# Altium PCB PCB1.PcbDoc (part 2 of 3)
Units mm, origin at the board's own origin, x right, y up, seen from the top; angles counter-clockwise.
Board outline 40 x 42 mm, 4 copper layers (Top Layer, GND, VCC, Bottom Layer), stack 4.941 mm thick; 42 components, 33 nets, 156 pads, 53 vias.
Unrouted connection lines stored in the file: 1.
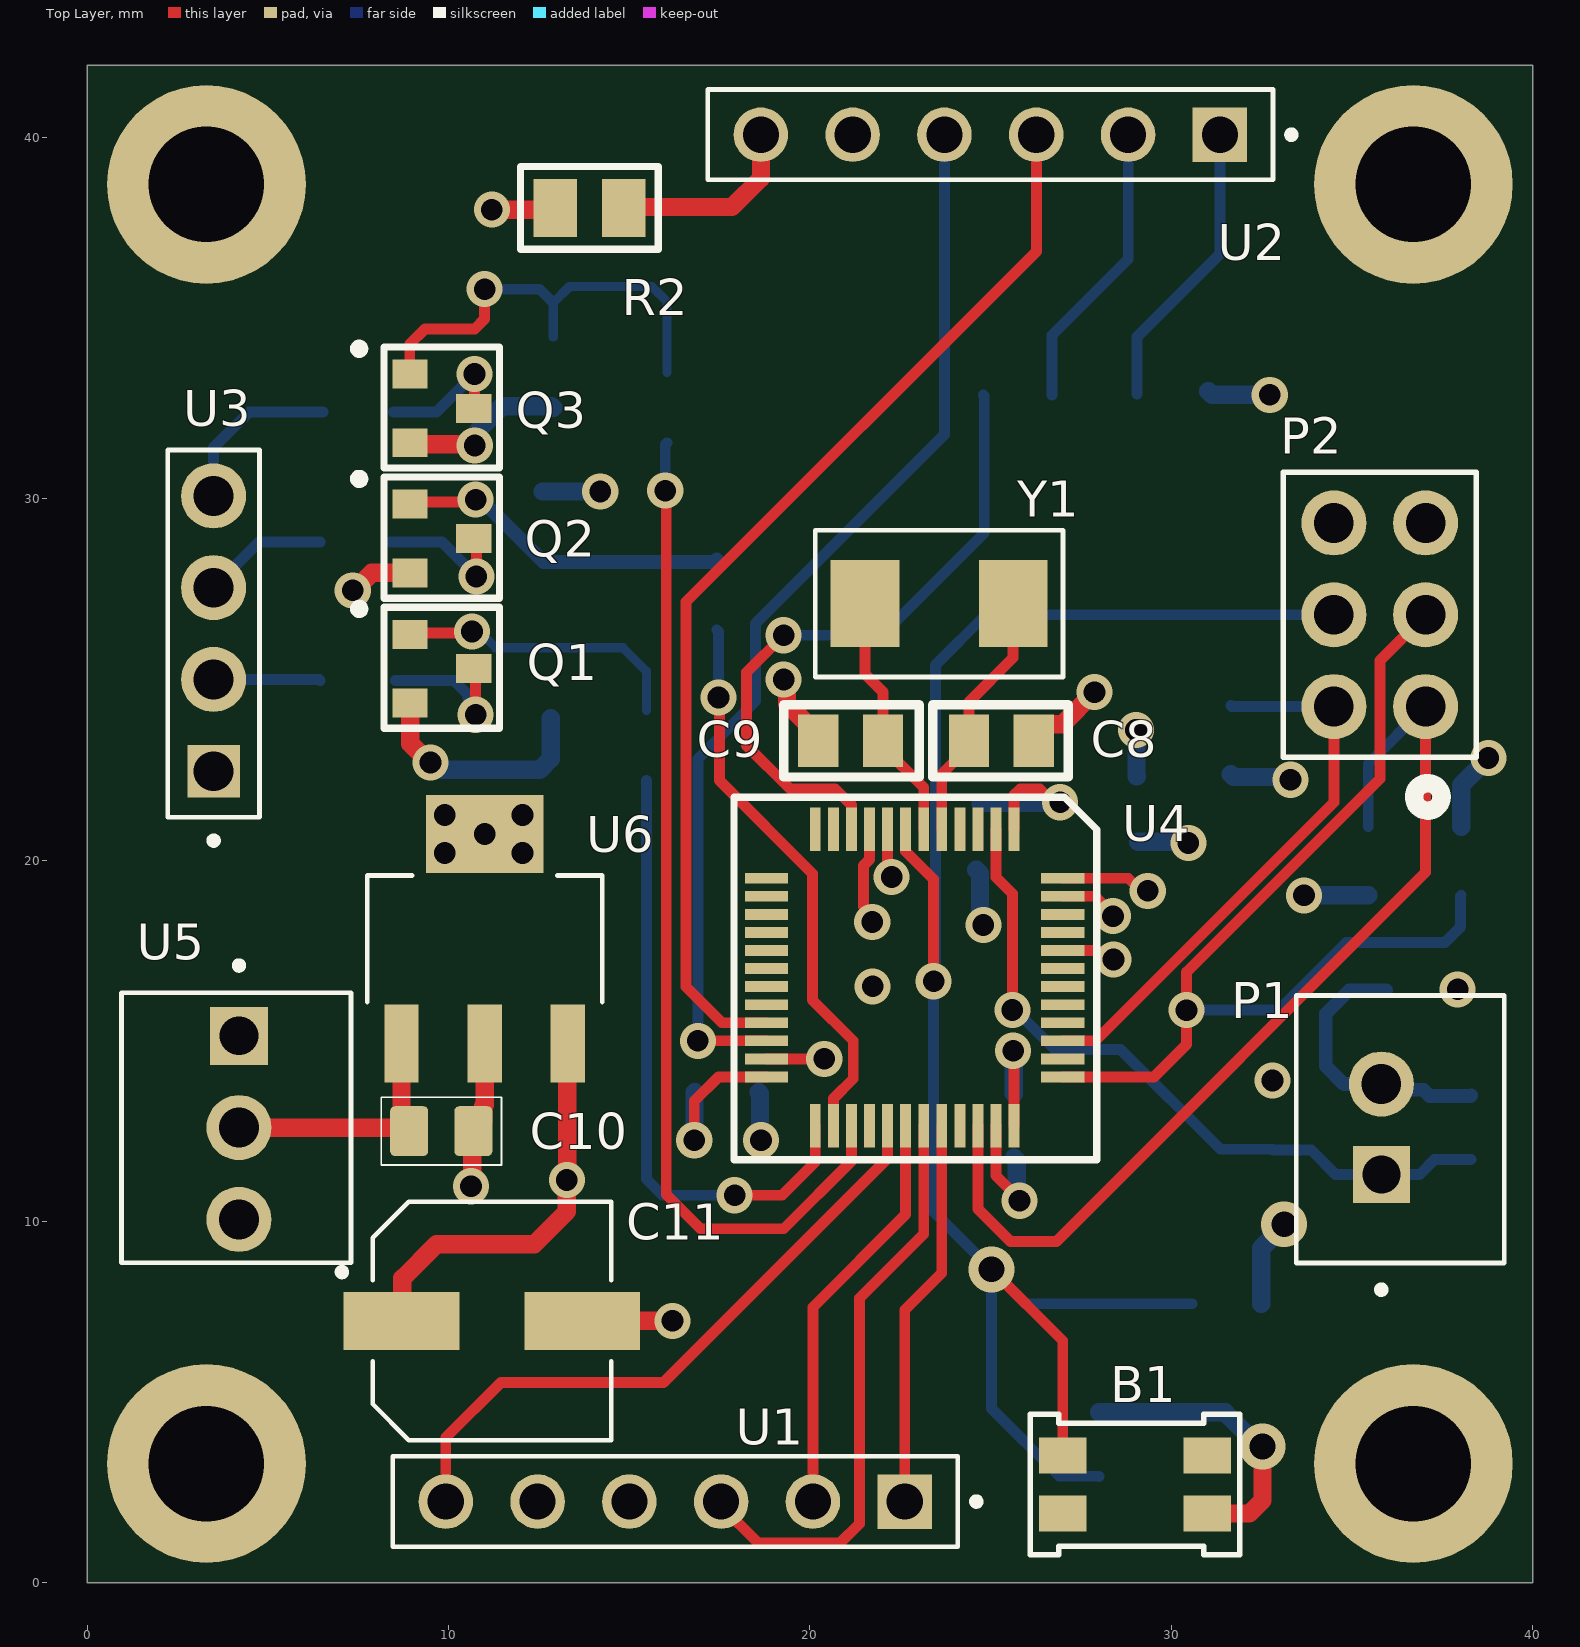
[diagram p0: Top Layer view]

## Part data (continued)
R1 R2 R3: library part MCU08050Z0000ZP500, "Zero Ohm Resistor, Jumper, 0805 [2012 Metric], Thin Film, 200 mW, 1.5 A, Surface Mount Device", Case Code (Imperial)=0805, Case Code (Metric)=2012, LCSC=C2074916, Manufacturer=Vishay, Max Operating Temperature=125°C, Max Power Dissipation=200mW, Min Operating Temperature=-55°C, Power Dissipation=125mW, Voltage Rating=150V, Case/Package=0805, Category="Chip SMD Resistors", China RoHS=Non-Compliant, ComponentLink1Description=https://datasheet.octopart.com:443/MCU08050Z0000ZP500-Vishay-datasheet-182027961.pdf?src-supplier=IHS, ComponentLink1URL=https://datasheet.octopart.com:443/MCU08050Z0000ZP500-Vishay-datasheet-182027961.pdf?src-supplier=IHS, ComponentLink2Description=https://datasheet.octopart.com:443/MCU08050Z0000ZP500-Vishay-datasheet-81842982.pdf?src-supplier=Upverter, ComponentLink2URL=https://datasheet.octopart.com:443/MCU08050Z0000ZP500-Vishay-datasheet-81842982.pdf?src-supplier=Upverter, ComponentLink3Description=https://datasheet.octopart.com:443/MCU08050Z0000ZP500-Vishay-datasheet-190005737.pdf?src-supplier=TME, ComponentLink3URL=https://datasheet.octopart.com:443/MCU08050Z0000ZP500-Vishay-datasheet-190005737.pdf?src-supplier=TME, ComponentLink4Description=https://datasheet.octopart.com:443/MCU08050Z0000ZP500-Vishay-datasheet-66078241.pdf?src-supplier=Newark, ComponentLink4URL=https://datasheet.octopart.com:443/MCU08050Z0000ZP500-Vishay-datasheet-66078241.pdf?src-supplier=Newark, ComponentLink5Description=https://datasheet.octopart.com:443/MCU08050Z0000ZP500-Vishay-datasheet-178522811.pdf?src-supplier=Newark, ComponentLink5URL=https://datasheet.octopart.com:443/MCU08050Z0000ZP500-Vishay-datasheet-178522811.pdf?src-supplier=Newark, ComponentLink6Description=https://datasheet.octopart.com:443/MCU08050Z0000ZP500-Vishay-datasheet-112277133.pdf?src-supplier=Newark, ComponentLink6URL=https://datasheet.octopart.com:443/MCU08050Z0000ZP500-Vishay-datasheet-112277133.pdf?src-supplier=Newark, ComponentLink7Description=https://datasheet.octopart.com/MCU08050Z0000ZP500-Vishay-datasheet-12543201.pdf, ComponentLink7URL=https://datasheet.octopart.com/MCU08050Z0000ZP500-Vishay-datasheet-12543201.pdf, ComponentLink8Description=https://datasheet.octopart.com/MCU08050Z0000ZP500-Vishay-datasheet-12532999.pdf, ComponentLink8URL=https://datasheet.octopart.com/MCU08050Z0000ZP500-Vishay-datasheet-12532999.pdf, ComponentLink9Description=https://datasheet.octopart.com/MCU08050Z0000ZP500-Vishay-datasheet-12520289.pdf, ComponentLink9URL=https://datasheet.octopart.com/MCU08050Z0000ZP500-Vishay-datasheet-12520289.pdf, ComponentLink10Description=https://datasheet.octopart.com/MCU08050Z0000ZP500-Vishay-datasheet-12510709.pdf, ComponentLink10URL=https://datasheet.octopart.com/MCU08050Z0000ZP500-Vishay-datasheet-12510709.pdf, ComponentLink11Description=https://datasheet.octopart.com:443/MCU08050Z0000ZP500-Vishay-datasheet-57863180.pdf?src-supplier=Future+Electronics, ComponentLink11URL=https://datasheet.octopart.com:443/MCU08050Z0000ZP500-Vishay-datasheet-57863180.pdf?src-supplier=Future+Electronics, ComponentLink12Description=https://datasheet.octopart.com:443/MCU08050Z0000ZP500-Vishay-datasheet-11731685.pdf?src-supplier=Arrow+Electronics, ComponentLink12URL=https://datasheet.octopart.com:443/MCU08050Z0000ZP500-Vishay-datasheet-11731685.pdf?src-supplier=Arrow+Electronics, ComponentLink13Description=http://sigma.octopart.com:80/rohs_statement/Vishay-company-15.pdf?src-supplier=Compliance+Statements, ComponentLink13URL=http://sigma.octopart.com:80/rohs_statement/Vishay-company-15.pdf?src-supplier=Compliance+Statements, Composition="Thin Film", Contact Plating=Tin, Depth=1.25mm, Height=450µm, Lead Free="Lead Free", Lifecycle Status=Production, Manufacturer Part Number=MCU08050Z0000ZP500, Military Standard=Not, Mounting Technology="Surface Mount", Number of Terminals=2, Number of Terminations=2, Power Rating=200mW, Pricing="5000=0,03643, 10000=0,03612, 20000=0,0355, 30000=0,03488, 40000=0,03426 (USD)", Radiation Hardening=No, REACH SVHC=Yes, RoHS=Compliant, Stock=5000, Supplier=Avnet, Supplier Part Number=MCU08050Z0000ZP500, Voltage Rating (DC)=150V, Width=1.25mm
R4 R7 R11 R12: library part CRCW0805100RFKEA, "Res Thick Film 0805 100 Ohm 1% 0.125W(1/8W) ±100ppm/℃ Pad SMD Automotive T/R", Case Code (Imperial)=0805, LCSC=C844936, Manufacturer=Vishay, Manufacturer Package Identifier=CRCW0805-e3, Max Operating Temperature=155°C, Max Power Dissipation=125mW, Min Operating Temperature=-55°C, Supplier Part Number=541-100CCT-ND, Temperature Coefficient=100ppm/°C, Tolerance=1%, Voltage Rating=150V, Case/Package=0805, Category="Chip SMD Resistors", China RoHS=Non-Compliant, ComponentLink1Description=https://datasheet.octopart.com:443/CRCW0805100RFKEA-Vishay-datasheet-175423584.pdf?src-supplier=IHS, ComponentLink1URL=https://datasheet.octopart.com:443/CRCW0805100RFKEA-Vishay-datasheet-175423584.pdf?src-supplier=IHS, ComponentLink2Description=https://datasheet.octopart.com:443/CRCW0805100RFKEA-Vishay-datasheet-83961561.pdf?src-supplier=Newark, ComponentLink2URL=https://datasheet.octopart.com:443/CRCW0805100RFKEA-Vishay-datasheet-83961561.pdf?src-supplier=Newark, ComponentLink3Description=https://datasheet.octopart.com:443/CRCW0805100RFKEA-Vishay-datasheet-11516975.pdf?src-supplier=Newark, ComponentLink3URL=https://datasheet.octopart.com:443/CRCW0805100RFKEA-Vishay-datasheet-11516975.pdf?src-supplier=Newark, ComponentLink4Description=https://datasheet.octopart.com:443/CRCW0805100RFKEA-Vishay-datasheet-41302739.pdf?src-supplier=Newark, ComponentLink4URL=https://datasheet.octopart.com:443/CRCW0805100RFKEA-Vishay-datasheet-41302739.pdf?src-supplier=Newark, ComponentLink5Description=https://datasheet.octopart.com:443/CRCW0805100RFKEA-Vishay-datasheet-33013972.pdf?src-supplier=Newark, ComponentLink5URL=https://datasheet.octopart.com:443/CRCW0805100RFKEA-Vishay-datasheet-33013972.pdf?src-supplier=Newark, ComponentLink6Description=https://datasheet.octopart.com:443/CRCW0805100RFKEA-Vishay-datasheet-62317937.pdf?src-supplier=element14+APAC, ComponentLink6URL=https://datasheet.octopart.com:443/CRCW0805100RFKEA-Vishay-datasheet-62317937.pdf?src-supplier=element14+APAC, ComponentLink7Description=https://datasheet.octopart.com:443/CRCW0805100RFKEA-Vishay-datasheet-14722531.pdf?src-supplier=element14+APAC, ComponentLink7URL=https://datasheet.octopart.com:443/CRCW0805100RFKEA-Vishay-datasheet-14722531.pdf?src-supplier=element14+APAC, ComponentLink8Description=https://datasheet.octopart.com:443/CRCW0805100RFKEA.-Vishay-datasheet-78776209.pdf?src-supplier=element14+APAC, ComponentLink8URL=https://datasheet.octopart.com:443/CRCW0805100RFKEA.-Vishay-datasheet-78776209.pdf?src-supplier=element14+APAC, ComponentLink9Description=https://datasheet.octopart.com:443/CRCW0805100RFKEA-Vishay-datasheet-66077789.pdf?src-supplier=element14+APAC, ComponentLink9URL=https://datasheet.octopart.com:443/CRCW0805100RFKEA-Vishay-datasheet-66077789.pdf?src-supplier=element14+APAC, ComponentLink10Description=https://datasheet.octopart.com:443/CRCW0805100RFKEA-Vishay-datasheet-16179825.pdf?src-supplier=element14+APAC, ComponentLink10URL=https://datasheet.octopart.com:443/CRCW0805100RFKEA-Vishay-datasheet-16179825.pdf?src-supplier=element14+APAC, ComponentLink11Description=https://datasheet.octopart.com:443/CRCW0805100RFKEA-Vishay-datasheet-5300368.pdf?src-supplier=Future+Electronics, ComponentLink11URL=https://datasheet.octopart.com:443/CRCW0805100RFKEA-Vishay-datasheet-5300368.pdf?src-supplier=Future+Electronics, ComponentLink12Description=https://datasheet.octopart.com:443/CRCW0805100RFKEA-Vishay-datasheet-62316122.pdf?src-supplier=Future+Electronics, ComponentLink12URL=https://datasheet.octopart.com:443/CRCW0805100RFKEA-Vishay-datasheet-62316122.pdf?src-supplier=Future+Electronics, ComponentLink13Description=https://datasheet.octopart.com:443/CRCW0805100RFKEA-Vishay-datasheet-5306405.pdf?src-supplier=RS+(Formerly+Allied+Electronics), ComponentLink13URL=https://datasheet.octopart.com:443/CRCW0805100RFKEA-Vishay-datasheet-5306405.pdf?src-supplier=RS+(Formerly+Allied+Electronics), ComponentLink14Description=https://datasheet.octopart.com:443/CRCW0805100RFKEA-Vishay-Dale-datasheet-47688880.pdf?src-supplier=RS+(Formerly+Allied+Electronics), ComponentLink14URL=https://datasheet.octopart.com:443/CRCW0805100RFKEA-Vishay-Dale-datasheet-47688880.pdf?src-supplier=RS+(Formerly+Allied+Electronics), ComponentLink15Description=https://datasheet.octopart.com:443/CRCW0805100RFKEA-Vishay-datasheet-12001583.pdf?src-supplier=RS+(Formerly+Allied+Electronics), ComponentLink15URL=https://datasheet.octopart.com:443/CRCW0805100RFKEA-Vishay-datasheet-12001583.pdf?src-supplier=RS+(Formerly+Allied+Electronics), ComponentLink16Description=https://datasheet.octopart.com:443/CRCW0805100RFKEA-Vishay-datasheet-17834126.pdf?src-supplier=TME, ComponentLink16URL=https://datasheet.octopart.com:443/CRCW0805100RFKEA-Vishay-datasheet-17834126.pdf?src-supplier=TME, ComponentLink17Description=https://datasheet.octopart.com/D-CRCW-e3-Standard-Thick-Film-Chip-Resistors-Vishay-datasheet-family-64.pdf, ComponentLink17URL=https://datasheet.octopart.com/D-CRCW-e3-Standard-Thick-Film-Chip-Resistors-Vishay-datasheet-family-64.pdf, ComponentLink18Description=https://datasheet.octopart.com:443/CRCW0805100RFKEA-Vishay-datasheet-13242068.pdf?src-supplier=Farnell, ComponentLink18URL=https://datasheet.octopart.com:443/CRCW0805100RFKEA-Vishay-datasheet-13242068.pdf?src-supplier=Farnell, ComponentLink19Description=https://datasheet.octopart.com:443/CRCW0805100RFKEA-Vishay-datasheet-13195083.pdf?src-supplier=Farnell, ComponentLink19URL=https://datasheet.octopart.com:443/CRCW0805100RFKEA-Vishay-datasheet-13195083.pdf?src-supplier=Farnell, ComponentLink20Description=https://datasheet.octopart.com:443/CRCW0805100RFKEA-Vishay-datasheet-13034211.pdf?src-supplier=Farnell, ComponentLink20URL=https://datasheet.octopart.com:443/CRCW0805100RFKEA-Vishay-datasheet-13034211.pdf?src-supplier=Farnell, ComponentLink21Description=https://datasheet.octopart.com:443/CRCW0805100RFKEA-Vishay-datasheet-12600034.pdf?src-supplier=Farnell, ComponentLink21URL=https://datasheet.octopart.com:443/CRCW0805100RFKEA-Vishay-datasheet-12600034.pdf?src-supplier=Farnell, ComponentLink22Description=https://datasheet.octopart.com:443/CRCW0805100RFKEA-Vishay-datasheet-12532161.pdf?src-supplier=Farnell, ComponentLink22URL=https://datasheet.octopart.com:443/CRCW0805100RFKEA-Vishay-datasheet-12532161.pdf?src-supplier=Farnell, ComponentLink23Description=https://datasheet.octopart.com:443/CRCW0805100RFKEA-Vishay-datasheet-12517896.pdf?src-supplier=Farnell, ComponentLink23URL=https://datasheet.octopart.com:443/CRCW0805100RFKEA-Vishay-datasheet-12517896.pdf?src-supplier=Farnell, ComponentLink24Description=https://datasheet.octopart.com:443/CRCW0805100RFKEA-Vishay-datasheet-12509762.pdf?src-supplier=Farnell, ComponentLink24URL=https://datasheet.octopart.com:443/CRCW0805100RFKEA-Vishay-datasheet-12509762.pdf?src-supplier=Farnell, ComponentLink25Description=https://datasheet.octopart.com:443/CRCW0805100RFKEA-Vishay-datasheet-10322335.pdf?src-supplier=Farnell, ComponentLink25URL=https://datasheet.octopart.com:443/CRCW0805100RFKEA-Vishay-datasheet-10322335.pdf?src-supplier=Farnell, ComponentLink26Description=https://datasheet.octopart.com:443/CRCW0805100RFKEA-Vishay-datasheet-8788789.pdf?src-supplier=Farnell, ComponentLink26URL=https://datasheet.octopart.com:443/CRCW0805100RFKEA-Vishay-datasheet-8788789.pdf?src-supplier=Farnell, ComponentLink27Description=https://datasheet.octopart.com:443/CRCW0805100RFKEA-Vishay-datasheet-8361388.pdf?src-supplier=Farnell, ComponentLink27URL=https://datasheet.octopart.com:443/CRCW0805100RFKEA-Vishay-datasheet-8361388.pdf?src-supplier=Farnell, ComponentLink28Description=https://datasheet.octopart.com:443/CRCW0805100RFKEA-Vishay-datasheet-546287.pdf?src-supplier=Farnell, ComponentLink28URL=https://datasheet.octopart.com:443/CRCW0805100RFKEA-Vishay-datasheet-546287.pdf?src-supplier=Farnell, ComponentLink29Description=https://datasheet.octopart.com:443/CRCW0805100RFKEA-Vishay-datasheet-11540273.pdf?src-supplier=Arrow+Electronics, ComponentLink29URL=https://datasheet.octopart.com:443/CRCW0805100RFKEA-Vishay-datasheet-11540273.pdf?src-supplier=Arrow+Electronics, ComponentLink30Description=https://datasheet.octopart.com:443/CRCW0805100RFKEA-Vishay-datasheet-8445837.pdf?src-supplier=element14, ComponentLink30URL=https://datasheet.octopart.com:443/CRCW0805100RFKEA-Vishay-datasheet-8445837.pdf?src-supplier=element14, ComponentLink31Description=https://datasheet.octopart.com:443/CRCW0805100RFKEA-Vishay-datasheet-5377306.pdf?src-supplier=Garrett, ComponentLink31URL=https://datasheet.octopart.com:443/CRCW0805100RFKEA-Vishay-datasheet-5377306.pdf?src-supplier=Garrett, ComponentLink32Description=https://datasheet.octopart.com:443/CRCW0805100RFKEA-Vishay-datasheet-148188.pdf?src-supplier=Garrett, ComponentLink32URL=https://datasheet.octopart.com:443/CRCW0805100RFKEA-Vishay-datasheet-148188.pdf?src-supplier=Garrett, ComponentLink33Description=https://datasheet.octopart.com:443/CRCW0805100RFKEA-Vishay-datasheet-34203.pdf?src-supplier=Garrett, ComponentLink33URL=https://datasheet.octopart.com:443/CRCW0805100RFKEA-Vishay-datasheet-34203.pdf?src-supplier=Garrett, ComponentLink34Description=http://sigma.octopart.com:80/rohs_certificate/D-CRCW-e3-Standard-Thick-Film-Chip-Resistors-Vishay-family-102.pdf?src-supplier=Compliance+Statements, ComponentLink34URL=http://sigma.octopart.com:80/rohs_certificate/D-CRCW-e3-Standard-Thick-Film-Chip-Resistors-Vishay-family-102.pdf?src-supplier=Compliance+Statements, Composition="Thick Film", Contact Plating=Tin, Depth=1.25mm, Features="Automotive AEC-Q200", Height=450µm, Lead Free="Lead Free", Length=2mm, Lifecycle Status=Production, Manufacturer Part Number=CRCW0805100RFKEA, Military Standard=Not, Mounting Technology="Surface Mount", Number of Terminals=2, Number of Terminations=2, Pins=2, Power Dissipation=125mW, Power Rating=125mW, Pricing="1=0,1, 10=0,041, 25=0,0312, 50=0,0256, 100=0,0212, 250=0,01692, 500=0,01448, 1000=0,01254 (USD)", Radiation Hardening=No, REACH SVHC=Yes, RoHS=Compliant, Schedule B="8533210045, 8533210045|8533210045|8533210045|8533210045|8533210045|8533210045|8533210045|8533210045|8533210045|8533210045|8533210045|8533210045|8533210045|8533210045|8533210045|8533210045|8533210045|8533210045|8533210045|8533210045|8533210045|8533210045|8533210045|85", Stock=224684, Supplier=DigiKey, Termination=SMD/SMT, Voltage Rating (DC)=150V, Weight=5.499807mg, Width=1.25mm, Working Voltage=150V
R5: library part CRCW0805270RFKEA, "Res Thick Film 0805 270 Ohm 1% 1/8W ±100ppm/°C Molded SMD SMD Paper T/R", Case Code (Imperial)=0805, LCSC=C844611, Manufacturer=Vishay, Manufacturer Package Identifier=CRCW0805-e3, Max Operating Temperature=155°C, Min Operating Temperature=-55°C, Power Dissipation=125mW, Supplier Part Number=541-270CCT-ND, Temperature Coefficient=100ppm/°C, Tolerance=1%, Voltage Rating=150V, Case/Package=0805, Category="Chip SMD Resistors", China RoHS=Non-Compliant, ComponentLink1Description=https://datasheet.octopart.com:443/CRCW0805270RFKEA-Vishay-datasheet-175423584.pdf?src-supplier=IHS, ComponentLink1URL=https://datasheet.octopart.com:443/CRCW0805270RFKEA-Vishay-datasheet-175423584.pdf?src-supplier=IHS, ComponentLink2Description=https://datasheet.octopart.com:443/CRCW0805270RFKEA-Vishay-datasheet-83961561.pdf?src-supplier=Newark, ComponentLink2URL=https://datasheet.octopart.com:443/CRCW0805270RFKEA-Vishay-datasheet-83961561.pdf?src-supplier=Newark, ComponentLink3Description=https://datasheet.octopart.com:443/CRCW0805270RFKEA-Vishay-datasheet-11516975.pdf?src-supplier=Newark, ComponentLink3URL=https://datasheet.octopart.com:443/CRCW0805270RFKEA-Vishay-datasheet-11516975.pdf?src-supplier=Newark, ComponentLink4Description=https://datasheet.octopart.com:443/CRCW0805270RFKEA-Vishay-datasheet-41302739.pdf?src-supplier=Newark, ComponentLink4URL=https://datasheet.octopart.com:443/CRCW0805270RFKEA-Vishay-datasheet-41302739.pdf?src-supplier=Newark, ComponentLink5Description=https://datasheet.octopart.com:443/CRCW0805270RFKEA-Vishay-datasheet-33013972.pdf?src-supplier=Newark, ComponentLink5URL=https://datasheet.octopart.com:443/CRCW0805270RFKEA-Vishay-datasheet-33013972.pdf?src-supplier=Newark, ComponentLink6Description=https://datasheet.octopart.com:443/CRCW0805270RFKEA-Vishay-datasheet-62317937.pdf?src-supplier=element14+APAC, ComponentLink6URL=https://datasheet.octopart.com:443/CRCW0805270RFKEA-Vishay-datasheet-62317937.pdf?src-supplier=element14+APAC, ComponentLink7Description=https://datasheet.octopart.com:443/CRCW0805270RFKEA-Vishay-datasheet-10882403.pdf?src-supplier=element14+APAC, ComponentLink7URL=https://datasheet.octopart.com:443/CRCW0805270RFKEA-Vishay-datasheet-10882403.pdf?src-supplier=element14+APAC, ComponentLink8Description=https://datasheet.octopart.com:443/CRCW0805270RFKEA.-Vishay-datasheet-78776209.pdf?src-supplier=element14+APAC, ComponentLink8URL=https://datasheet.octopart.com:443/CRCW0805270RFKEA.-Vishay-datasheet-78776209.pdf?src-supplier=element14+APAC, ComponentLink9Description=https://datasheet.octopart.com:443/CRCW0805270RFKEA-Vishay-datasheet-66077789.pdf?src-supplier=element14+APAC, ComponentLink9URL=https://datasheet.octopart.com:443/CRCW0805270RFKEA-Vishay-datasheet-66077789.pdf?src-supplier=element14+APAC, ComponentLink10Description=https://datasheet.octopart.com:443/CRCW0805270RFKEA-Vishay-datasheet-14722531.pdf?src-supplier=element14+APAC, ComponentLink10URL=https://datasheet.octopart.com:443/CRCW0805270RFKEA-Vishay-datasheet-14722531.pdf?src-supplier=element14+APAC, ComponentLink11Description=https://datasheet.octopart.com:443/CRCW0805270RFKEA-Vishay-datasheet-62316122.pdf?src-supplier=Future+Electronics, ComponentLink11URL=https://datasheet.octopart.com:443/CRCW0805270RFKEA-Vishay-datasheet-62316122.pdf?src-supplier=Future+Electronics, ComponentLink12Description=https://datasheet.octopart.com:443/CRCW0805270RFKEA-Vishay-datasheet-12519820.pdf?src-supplier=Future+Electronics, ComponentLink12URL=https://datasheet.octopart.com:443/CRCW0805270RFKEA-Vishay-datasheet-12519820.pdf?src-supplier=Future+Electronics, ComponentLink13Description=https://datasheet.octopart.com:443/CRCW0805270RFKEA-Vishay-datasheet-11551479.pdf?src-supplier=Future+Electronics, ComponentLink13URL=https://datasheet.octopart.com:443/CRCW0805270RFKEA-Vishay-datasheet-11551479.pdf?src-supplier=Future+Electronics, ComponentLink14Description=https://datasheet.octopart.com:443/CRCW0805270RFKEA-Vishay-datasheet-8325159.pdf?src-supplier=Future+Electronics, ComponentLink14URL=https://datasheet.octopart.com:443/CRCW0805270RFKEA-Vishay-datasheet-8325159.pdf?src-supplier=Future+Electronics, ComponentLink15Description=https://datasheet.octopart.com:443/CRCW0805270RFKEA-Vishay-datasheet-5390187.pdf?src-supplier=Future+Electronics, ComponentLink15URL=https://datasheet.octopart.com:443/CRCW0805270RFKEA-Vishay-datasheet-5390187.pdf?src-supplier=Future+Electronics, ComponentLink16Description=https://datasheet.octopart.com:443/CRCW0805270RFKEA-Vishay-Dale-datasheet-47688880.pdf?src-supplier=RS+(Formerly+Allied+Electronics), ComponentLink16URL=https://datasheet.octopart.com:443/CRCW0805270RFKEA-Vishay-Dale-datasheet-47688880.pdf?src-supplier=RS+(Formerly+Allied+Electronics), ComponentLink17Description=https://datasheet.octopart.com:443/CRCW0805270RFKEA-Vishay-datasheet-12001583.pdf?src-supplier=RS+(Formerly+Allied+Electronics), ComponentLink17URL=https://datasheet.octopart.com:443/CRCW0805270RFKEA-Vishay-datasheet-12001583.pdf?src-supplier=RS+(Formerly+Allied+Electronics), ComponentLink18Description=https://datasheet.octopart.com:443/CRCW0805270RFKEA-Vishay-datasheet-5306405.pdf?src-supplier=RS+(Formerly+Allied+Electronics), ComponentLink18URL=https://datasheet.octopart.com:443/CRCW0805270RFKEA-Vishay-datasheet-5306405.pdf?src-supplier=RS+(Formerly+Allied+Electronics), ComponentLink19Description=https://datasheet.octopart.com:443/CRCW0805270RFKEA-Vishay-datasheet-8445837.pdf?src-supplier=element14, ComponentLink19URL=https://datasheet.octopart.com:443/CRCW0805270RFKEA-Vishay-datasheet-8445837.pdf?src-supplier=element14, ComponentLink20Description=https://datasheet.octopart.com:443/CRCW0805270RFKEA-Vishay-datasheet-5300368.pdf?src-supplier=Farnell, ComponentLink20URL=https://datasheet.octopart.com:443/CRCW0805270RFKEA-Vishay-datasheet-5300368.pdf?src-supplier=Farnell, ComponentLink21Description=http://sigma.octopart.com:80/rohs_statement/Vishay-company-15.pdf?src-supplier=Compliance+Statements, ComponentLink21URL=http://sigma.octopart.com:80/rohs_statement/Vishay-company-15.pdf?src-supplier=Compliance+Statements, Composition="Thick Film", Contact Plating=Tin, Depth=1.25mm, Height=450µm, Lead Free="Lead Free", Length=2mm, Lifecycle Status=Production, Manufacturer Part Number=CRCW0805270RFKEA, Military Standard=Not, Mounting Technology="Surface Mount", Number of Terminals=2, Packaging="Cut Tape", Pins=2, Power Rating=125mW, Pricing="1=0,1, 10=0,041, 25=0,0312, 50=0,0256, 100=0,0212, 250=0,01692, 500=0,01448, 1000=0,01254 (USD)", Radiation Hardening=No, REACH SVHC=Yes, RoHS=Compliant, Schedule B="8533210045, 8533210045|8533210045, 8533210045|8533210045|8533210045, 8533210045|8533210045|8533210045|8533210045", Stock=11086, Supplier=DigiKey, Termination=SMD/SMT, Voltage Rating (DC)=150V, Weight=5.499807mg, Width=1.25mm, Working Voltage=150V
R6 R9 R14: library part CRCW0805100KFKEA, "Res Thick Film 0805 100K Ohm 1% 0.125W(1/8W) +/-100ppm/ßC Pad SMD Automotive T/R", Case Code (Imperial)=0805, LCSC=C844935, Manufacturer=Vishay, Manufacturer Package Identifier=CRCW0805-e3, Max Operating Temperature=155°C, Min Operating Temperature=-55°C, Power Dissipation=125mW, Supplier Part Number=541-100KCCT-ND, Temperature Coefficient=100ppm/°C, Tolerance=1%, Voltage Rating=150V, Case/Package=0805, Category="Chip SMD Resistors", China RoHS=Non-Compliant, ComponentLink1Description=https://datasheet.octopart.com:443/CRCW0805100KFKEA-Vishay-datasheet-175423584.pdf?src-supplier=IHS, ComponentLink1URL=https://datasheet.octopart.com:443/CRCW0805100KFKEA-Vishay-datasheet-175423584.pdf?src-supplier=IHS, ComponentLink2Description=https://datasheet.octopart.com:443/CRCW0805100KFKEA-Vishay-datasheet-141435152.pdf?src-supplier=Upverter, ComponentLink2URL=https://datasheet.octopart.com:443/CRCW0805100KFKEA-Vishay-datasheet-141435152.pdf?src-supplier=Upverter, ComponentLink3Description=https://datasheet.octopart.com:443/CRCW0805100KFKEA-Vishay-datasheet-83961561.pdf?src-supplier=element14+APAC, ComponentLink3URL=https://datasheet.octopart.com:443/CRCW0805100KFKEA-Vishay-datasheet-83961561.pdf?src-supplier=element14+APAC, ComponentLink4Description=https://datasheet.octopart.com:443/CRCW0805100KFKEA-Vishay-datasheet-62317937.pdf?src-supplier=element14+APAC, ComponentLink4URL=https://datasheet.octopart.com:443/CRCW0805100KFKEA-Vishay-datasheet-62317937.pdf?src-supplier=element14+APAC, ComponentLink5Description=https://datasheet.octopart.com:443/CRCW0805100KFKEA-Vishay-datasheet-14722531.pdf?src-supplier=element14+APAC, ComponentLink5URL=https://datasheet.octopart.com:443/CRCW0805100KFKEA-Vishay-datasheet-14722531.pdf?src-supplier=element14+APAC, ComponentLink6Description=https://datasheet.octopart.com:443/CRCW0805100KFKEA-Vishay-datasheet-66077789.pdf?src-supplier=element14+APAC, ComponentLink6URL=https://datasheet.octopart.com:443/CRCW0805100KFKEA-Vishay-datasheet-66077789.pdf?src-supplier=element14+APAC, ComponentLink7Description=https://datasheet.octopart.com:443/CRCW0805100KFKEA-Vishay-datasheet-16179825.pdf?src-supplier=element14+APAC, ComponentLink7URL=https://datasheet.octopart.com:443/CRCW0805100KFKEA-Vishay-datasheet-16179825.pdf?src-supplier=element14+APAC, ComponentLink8Description=https://datasheet.octopart.com:443/CRCW0805100KFKEA.-Vishay-datasheet-78776209.pdf?src-supplier=Newark, ComponentLink8URL=https://datasheet.octopart.com:443/CRCW0805100KFKEA.-Vishay-datasheet-78776209.pdf?src-supplier=Newark, ComponentLink9Description=https://datasheet.octopart.com:443/CRCW0805100KFKEA-Vishay-datasheet-11516975.pdf?src-supplier=Newark, ComponentLink9URL=https://datasheet.octopart.com:443/CRCW0805100KFKEA-Vishay-datasheet-11516975.pdf?src-supplier=Newark, ComponentLink10Description=https://datasheet.octopart.com:443/CRCW0805100KFKEA-Vishay-datasheet-33013972.pdf?src-supplier=Newark, ComponentLink10URL=https://datasheet.octopart.com:443/CRCW0805100KFKEA-Vishay-datasheet-33013972.pdf?src-supplier=Newark, ComponentLink11Description=https://datasheet.octopart.com:443/CRCW0805100KFKEA-Vishay-datasheet-21268114.pdf?src-supplier=Newark, ComponentLink11URL=https://datasheet.octopart.com:443/CRCW0805100KFKEA-Vishay-datasheet-21268114.pdf?src-supplier=Newark, ComponentLink12Description=https://datasheet.octopart.com:443/CRCW0805100KFKEA-Vishay-datasheet-5300368.pdf?src-supplier=Future+Electronics, ComponentLink12URL=https://datasheet.octopart.com:443/CRCW0805100KFKEA-Vishay-datasheet-5300368.pdf?src-supplier=Future+Electronics, ComponentLink13Description=https://datasheet.octopart.com:443/CRCW0805100KFKEA-Vishay-datasheet-62316122.pdf?src-supplier=Future+Electronics, ComponentLink13URL=https://datasheet.octopart.com:443/CRCW0805100KFKEA-Vishay-datasheet-62316122.pdf?src-supplier=Future+Electronics, ComponentLink14Description=https://datasheet.octopart.com:443/CRCW0805100KFKEA-Vishay-datasheet-5306405.pdf?src-supplier=RS+(Formerly+Allied+Electronics), ComponentLink14URL=https://datasheet.octopart.com:443/CRCW0805100KFKEA-Vishay-datasheet-5306405.pdf?src-supplier=RS+(Formerly+Allied+Electronics), ComponentLink15Description=https://datasheet.octopart.com:443/CRCW0805100KFKEA-Vishay-Dale-datasheet-47688880.pdf?src-supplier=RS+(Formerly+Allied+Electronics), ComponentLink15URL=https://datasheet.octopart.com:443/CRCW0805100KFKEA-Vishay-Dale-datasheet-47688880.pdf?src-supplier=RS+(Formerly+Allied+Electronics), ComponentLink16Description=https://datasheet.octopart.com:443/CRCW0805100KFKEA-Vishay-datasheet-12001583.pdf?src-supplier=RS+(Formerly+Allied+Electronics), ComponentLink16URL=https://datasheet.octopart.com:443/CRCW0805100KFKEA-Vishay-datasheet-12001583.pdf?src-supplier=RS+(Formerly+Allied+Electronics), ComponentLink17Description=https://datasheet.octopart.com:443/CRCW0805100KFKEA-Vishay-datasheet-17834126.pdf?src-supplier=TME, ComponentLink17URL=https://datasheet.octopart.com:443/CRCW0805100KFKEA-Vishay-datasheet-17834126.pdf?src-supplier=TME, ComponentLink18Description=https://datasheet.octopart.com:443/CRCW0805100KFKEA-Vishay-datasheet-13242068.pdf?src-supplier=Farnell, ComponentLink18URL=https://datasheet.octopart.com:443/CRCW0805100KFKEA-Vishay-datasheet-13242068.pdf?src-supplier=Farnell, ComponentLink19Description=https://datasheet.octopart.com:443/CRCW0805100KFKEA-Vishay-datasheet-13195083.pdf?src-supplier=Farnell, ComponentLink19URL=https://datasheet.octopart.com:443/CRCW0805100KFKEA-Vishay-datasheet-13195083.pdf?src-supplier=Farnell, ComponentLink20Description=https://datasheet.octopart.com:443/CRCW0805100KFKEA-Vishay-datasheet-13034211.pdf?src-supplier=Farnell, ComponentLink20URL=https://datasheet.octopart.com:443/CRCW0805100KFKEA-Vishay-datasheet-13034211.pdf?src-supplier=Farnell, ComponentLink21Description=https://datasheet.octopart.com:443/CRCW0805100KFKEA-Vishay-datasheet-12600034.pdf?src-supplier=Farnell, ComponentLink21URL=https://datasheet.octopart.com:443/CRCW0805100KFKEA-Vishay-datasheet-12600034.pdf?src-supplier=Farnell, ComponentLink22Description=https://datasheet.octopart.com:443/CRCW0805100KFKEA-Vishay-datasheet-12532161.pdf?src-supplier=Farnell, ComponentLink22URL=https://datasheet.octopart.com:443/CRCW0805100KFKEA-Vishay-datasheet-12532161.pdf?src-supplier=Farnell, ComponentLink23Description=https://datasheet.octopart.com:443/CRCW0805100KFKEA-Vishay-datasheet-12517896.pdf?src-supplier=Farnell, ComponentLink23URL=https://datasheet.octopart.com:443/CRCW0805100KFKEA-Vishay-datasheet-12517896.pdf?src-supplier=Farnell, ComponentLink24Description=https://datasheet.octopart.com:443/CRCW0805100KFKEA-Vishay-datasheet-12509762.pdf?src-supplier=Farnell, ComponentLink24URL=https://datasheet.octopart.com:443/CRCW0805100KFKEA-Vishay-datasheet-12509762.pdf?src-supplier=Farnell, ComponentLink25Description=https://datasheet.octopart.com:443/CRCW0805100KFKEA-Vishay-datasheet-10322335.pdf?src-supplier=Farnell, ComponentLink25URL=https://datasheet.octopart.com:443/CRCW0805100KFKEA-Vishay-datasheet-10322335.pdf?src-supplier=Farnell, ComponentLink26Description=https://datasheet.octopart.com:443/CRCW0805100KFKEA-Vishay-datasheet-8788789.pdf?src-supplier=Farnell, ComponentLink26URL=https://datasheet.octopart.com:443/CRCW0805100KFKEA-Vishay-datasheet-8788789.pdf?src-supplier=Farnell, ComponentLink27Description=https://datasheet.octopart.com:443/CRCW0805100KFKEA-Vishay-datasheet-8361388.pdf?src-supplier=Farnell, ComponentLink27URL=https://datasheet.octopart.com:443/CRCW0805100KFKEA-Vishay-datasheet-8361388.pdf?src-supplier=Farnell, ComponentLink28Description=https://datasheet.octopart.com:443/CRCW0805100KFKEA-Vishay-datasheet-546287.pdf?src-supplier=Farnell, ComponentLink28URL=https://datasheet.octopart.com:443/CRCW0805100KFKEA-Vishay-datasheet-546287.pdf?src-supplier=Farnell, ComponentLink29Description=https://datasheet.octopart.com:443/CRCW0805100KFKEA-Vishay-datasheet-11540273.pdf?src-supplier=Arrow+Electronics, ComponentLink29URL=https://datasheet.octopart.com:443/CRCW0805100KFKEA-Vishay-datasheet-11540273.pdf?src-supplier=Arrow+Electronics, ComponentLink30Description=https://datasheet.octopart.com:443/CRCW0805100KFKEA-Vishay-datasheet-8445837.pdf?src-supplier=element14, ComponentLink30URL=https://datasheet.octopart.com:443/CRCW0805100KFKEA-Vishay-datasheet-8445837.pdf?src-supplier=element14, ComponentLink31Description=https://datasheet.octopart.com:443/CRCW0805100KFKEA-Vishay-datasheet-5377306.pdf?src-supplier=Garrett, ComponentLink31URL=https://datasheet.octopart.com:443/CRCW0805100KFKEA-Vishay-datasheet-5377306.pdf?src-supplier=Garrett, ComponentLink32Description=https://datasheet.octopart.com:443/CRCW0805100KFKEA-Vishay-datasheet-148188.pdf?src-supplier=Garrett, ComponentLink32URL=https://datasheet.octopart.com:443/CRCW0805100KFKEA-Vishay-datasheet-148188.pdf?src-supplier=Garrett, ComponentLink33Description=https://datasheet.octopart.com:443/CRCW0805100KFKEA-Vishay-datasheet-34203.pdf?src-supplier=Garrett, ComponentLink33URL=https://datasheet.octopart.com:443/CRCW0805100KFKEA-Vishay-datasheet-34203.pdf?src-supplier=Garrett, ComponentLink34Description=http://sigma.octopart.com:80/rohs_statement/Vishay-company-15.pdf?src-supplier=Compliance+Statements, ComponentLink34URL=http://sigma.octopart.com:80/rohs_statement/Vishay-company-15.pdf?src-supplier=Compliance+Statements, Composition="Thick Film", Contact Plating=Tin, Depth=1.25mm, Height=450µm, Lead Free="Lead Free", Length=2mm, Lifecycle Status=Production, Manufacturer Part Number=CRCW0805100KFKEA, Military Standard=Not, Mounting Technology="Surface Mount", Number of Terminals=2, Packaging="Cut Tape", Pins=2, Power Rating=125mW, Pricing="1=0,1, 10=0,041, 25=0,0312, 50=0,0256, 100=0,0212, 250=0,01692, 500=0,01448, 1000=0,01254 (USD)", Radiation Hardening=No, REACH SVHC=Yes, RoHS=Compliant, Schedule B="8533210045, 8533210045|8533210045|8533210045|8533210045|8533210045|8533210045|8533210045|8533210045|8533210045|8533210045|8533210045|8533210045|8533210045|8533210045|8533210045|8533210045|8533210045|8533210045|8533210045|8533210045|8533210045|8533210045|8533210045|85", Stock=307439, Supplier=DigiKey, Termination=SMD/SMT, Voltage Rating (DC)=150V, Weight=5.499807mg, Width=1.25mm, Working Voltage=150V
R8 R13: library part CRCW0805180RFKEA, "Res Thick Film 0805 180 Ohm 1% 1/8W ±100ppm/°C Molded SMD SMD Paper T/R", Case Code (Imperial)=0805, LCSC=C844397, Manufacturer=Vishay, Manufacturer Package Identifier=CRCW0805-e3, Max Operating Temperature=155°C, Max Power Dissipation=125mW, Min Operating Temperature=-55°C, Supplier Part Number=541-180CCT-ND, Temperature Coefficient=100ppm/°C, Tolerance=1%, Voltage Rating=150V, Case/Package=0805, Category="Chip SMD Resistors", China RoHS=Non-Compliant, ComponentLink1Description=https://datasheet.octopart.com:443/CRCW0805180RFKEA-Vishay-datasheet-175423584.pdf?src-supplier=IHS, ComponentLink1URL=https://datasheet.octopart.com:443/CRCW0805180RFKEA-Vishay-datasheet-175423584.pdf?src-supplier=IHS, ComponentLink2Description=https://datasheet.octopart.com:443/CRCW0805180RFKEA-Vishay-datasheet-5300368.pdf?src-supplier=Farnell, ComponentLink2URL=https://datasheet.octopart.com:443/CRCW0805180RFKEA-Vishay-datasheet-5300368.pdf?src-supplier=Farnell, ComponentLink3Description=https://datasheet.octopart.com:443/CRCW0805180RFKEA-Vishay-datasheet-83961561.pdf?src-supplier=Newark, ComponentLink3URL=https://datasheet.octopart.com:443/CRCW0805180RFKEA-Vishay-datasheet-83961561.pdf?src-supplier=Newark, ComponentLink4Description=https://datasheet.octopart.com:443/CRCW0805180RFKEA-Vishay-datasheet-11516975.pdf?src-supplier=Newark, ComponentLink4URL=https://datasheet.octopart.com:443/CRCW0805180RFKEA-Vishay-datasheet-11516975.pdf?src-supplier=Newark, ComponentLink5Description=https://datasheet.octopart.com:443/CRCW0805180RFKEA-Vishay-datasheet-41302739.pdf?src-supplier=Newark, ComponentLink5URL=https://datasheet.octopart.com:443/CRCW0805180RFKEA-Vishay-datasheet-41302739.pdf?src-supplier=Newark, ComponentLink6Description=https://datasheet.octopart.com:443/CRCW0805180RFKEA-Vishay-datasheet-33013972.pdf?src-supplier=Newark, ComponentLink6URL=https://datasheet.octopart.com:443/CRCW0805180RFKEA-Vishay-datasheet-33013972.pdf?src-supplier=Newark, ComponentLink7Description=https://datasheet.octopart.com:443/CRCW0805180RFKEA-Vishay-datasheet-66077789.pdf?src-supplier=element14+APAC, ComponentLink7URL=https://datasheet.octopart.com:443/CRCW0805180RFKEA-Vishay-datasheet-66077789.pdf?src-supplier=element14+APAC, ComponentLink8Description=https://datasheet.octopart.com:443/CRCW0805180RFKEA-Vishay-datasheet-62317937.pdf?src-supplier=element14+APAC, ComponentLink8URL=https://datasheet.octopart.com:443/CRCW0805180RFKEA-Vishay-datasheet-62317937.pdf?src-supplier=element14+APAC, ComponentLink9Description=https://datasheet.octopart.com:443/CRCW0805180RFKEA-Vishay-datasheet-10882403.pdf?src-supplier=element14+APAC, ComponentLink9URL=https://datasheet.octopart.com:443/CRCW0805180RFKEA-Vishay-datasheet-10882403.pdf?src-supplier=element14+APAC, ComponentLink10Description=https://datasheet.octopart.com:443/CRCW0805180RFKEA.-Vishay-datasheet-78776209.pdf?src-supplier=element14+APAC, ComponentLink10URL=https://datasheet.octopart.com:443/CRCW0805180RFKEA.-Vishay-datasheet-78776209.pdf?src-supplier=element14+APAC, ComponentLink11Description=https://datasheet.octopart.com:443/CRCW0805180RFKEA-Vishay-datasheet-14722531.pdf?src-supplier=element14+APAC, ComponentLink11URL=https://datasheet.octopart.com:443/CRCW0805180RFKEA-Vishay-datasheet-14722531.pdf?src-supplier=element14+APAC, ComponentLink12Description=https://datasheet.octopart.com:443/CRCW0805180RFKEA-Vishay-datasheet-62316122.pdf?src-supplier=Future+Electronics, ComponentLink12URL=https://datasheet.octopart.com:443/CRCW0805180RFKEA-Vishay-datasheet-62316122.pdf?src-supplier=Future+Electronics, ComponentLink13Description=https://datasheet.octopart.com:443/CRCW0805180RFKEA-Vishay-datasheet-12519820.pdf?src-supplier=Future+Electronics, ComponentLink13URL=https://datasheet.octopart.com:443/CRCW0805180RFKEA-Vishay-datasheet-12519820.pdf?src-supplier=Future+Electronics, ComponentLink14Description=https://datasheet.octopart.com:443/CRCW0805180RFKEA-Vishay-Dale-datasheet-47688880.pdf?src-supplier=RS+(Formerly+Allied+Electronics), ComponentLink14URL=https://datasheet.octopart.com:443/CRCW0805180RFKEA-Vishay-Dale-datasheet-47688880.pdf?src-supplier=RS+(Formerly+Allied+Electronics), ComponentLink15Description=https://datasheet.octopart.com:443/CRCW0805180RFKEA-Vishay-datasheet-12001583.pdf?src-supplier=RS+(Formerly+Allied+Electronics), ComponentLink15URL=https://datasheet.octopart.com:443/CRCW0805180RFKEA-Vishay-datasheet-12001583.pdf?src-supplier=RS+(Formerly+Allied+Electronics), ComponentLink16Description=https://datasheet.octopart.com:443/CRCW0805180RFKEA-Vishay-datasheet-5306405.pdf?src-supplier=RS+(Formerly+Allied+Electronics), ComponentLink16URL=https://datasheet.octopart.com:443/CRCW0805180RFKEA-Vishay-datasheet-5306405.pdf?src-supplier=RS+(Formerly+Allied+Electronics), ComponentLink17Description=https://datasheet.octopart.com:443/CRCW0805180RFKEA-Vishay-datasheet-8619608.pdf?src-supplier=element14, ComponentLink17URL=https://datasheet.octopart.com:443/CRCW0805180RFKEA-Vishay-datasheet-8619608.pdf?src-supplier=element14, ComponentLink18Description=https://datasheet.octopart.com:443/CRCW0805180RFKEA-Vishay-datasheet-5377306.pdf?src-supplier=Garrett, ComponentLink18URL=https://datasheet.octopart.com:443/CRCW0805180RFKEA-Vishay-datasheet-5377306.pdf?src-supplier=Garrett, ComponentLink19Description=http://sigma.octopart.com:80/rohs_statement/Vishay-company-15.pdf?src-supplier=Compliance+Statements, ComponentLink19URL=http://sigma.octopart.com:80/rohs_statement/Vishay-company-15.pdf?src-supplier=Compliance+Statements, Composition="Thick Film", Contact Plating=Tin, Depth=1.25mm, Features="Automotive AEC-Q200", Height=450µm, Lead Free="Lead Free", Length=2mm, Lifecycle Status=Production, Manufacturer Part Number=CRCW0805180RFKEA, Military Standard=Not, Mounting Technology="Surface Mount", Number of Terminals=2, Number of Terminations=2, Packaging="Cut Tape", Pins=2, Power Dissipation=125mW, Power Rating=125mW, Pricing="1=0,1, 10=0,041, 25=0,0312, 50=0,0256, 100=0,0212, 250=0,01692, 500=0,01456, 1000=0,01254 (USD)", Radiation Hardening=No, REACH SVHC=Yes, RoHS=Compliant, Schedule B="8533210045, 8533210045|8533210045|8533210045|8533210045|8533210045|8533210045|8533210045|8533210045|8533210045|8533210045|8533210045|8533210045|8533210045|8533210045|8533210045|8533210045|8533210045|8533210045|8533210045|8533210045|8533210045|8533210045|8533210045|85", Stock=20841, Supplier=DigiKey, Termination=SMD/SMT, Voltage Rating (DC)=150V, Weight=5.499807mg, Width=1.25mm, Working Voltage=150V
R10 R15 R16 R17 R18: library part MCU0805MD1002DP500, "Fixed Resistor, Thin Film, 0.14W, 10000ohm, 150V, 0.5% +/-Tol, 25ppm/Cel, Surface Mount, 0805", Case Code (Imperial)=0805, Case Code (Metric)=2012, LCSC=C2090685, Manufacturer=Vishay, Max Operating Temperature=125°C, Max Power Dissipation=200mW, Min Operating Temperature=-55°C, Power Dissipation=140mW, Supplier Part Number=MCU0805-10.0K-MDCT-ND, Temperature Coefficient=25ppm/°C, Tolerance=0.5%, Voltage Rating=150V, Case/Package=0805, Category="Chip SMD Resistors", China RoHS=Non-Compliant, ComponentLink1Description=https://datasheet.octopart.com:443/MCU0805MD1002DP500-Vishay-datasheet-182027964.pdf?src-supplier=IHS, ComponentLink1URL=https://datasheet.octopart.com:443/MCU0805MD1002DP500-Vishay-datasheet-182027964.pdf?src-supplier=IHS, ComponentLink2Description=https://datasheet.octopart.com:443/MCU0805MD1002DP500-Vishay-datasheet-81842982.pdf?src-supplier=Upverter, ComponentLink2URL=https://datasheet.octopart.com:443/MCU0805MD1002DP500-Vishay-datasheet-81842982.pdf?src-supplier=Upverter, ComponentLink3Description=https://datasheet.octopart.com:443/MCU0805MD1002DP500-Vishay-datasheet-169971017.pdf?src-supplier=Future+Electronics, ComponentLink3URL=https://datasheet.octopart.com:443/MCU0805MD1002DP500-Vishay-datasheet-169971017.pdf?src-supplier=Future+Electronics, ComponentLink4Description=https://datasheet.octopart.com:443/MCU0805MD1002DP500-Vishay-datasheet-114607041.pdf?src-supplier=Future+Electronics, ComponentLink4URL=https://datasheet.octopart.com:443/MCU0805MD1002DP500-Vishay-datasheet-114607041.pdf?src-supplier=Future+Electronics, ComponentLink5Description=http://sigma.octopart.com:80/rohs_statement/Vishay-company-15.pdf?src-supplier=Compliance+Statements, ComponentLink5URL=http://sigma.octopart.com:80/rohs_statement/Vishay-company-15.pdf?src-supplier=Compliance+Statements, Composition="Thin Film", Features="Automotive AEC-Q200", Height=520µm, Length=2.0066mm, Lifecycle Status=Production, Manufacturer Part Number=MCU0805MD1002DP500, Mounting Technology="Surface Mount", Number of Terminals=2, Number of Terminations=2, Packaging=Digi-Reel®, Power Rating=200mW, Pricing="1=0,13, 10=0,108, 25=0,1008, 50=0,095, 100=0,0897, 250=0,08332, 500=0,0789, 1000=0,07487 (USD)", REACH SVHC=Yes, RoHS=Compliant, Stock=19723, Supplier=DigiKey, Termination=SMD/SMT, Weight=5.499807mg, Width=1.25mm, Working Voltage=150V
U1 U2: "Conn Socket Strip Receptacle 6 Position 2.54mm Solder Straight Through Hole Tube", Case/Package=SIL, Color=Black, Contact Resistance=20mΩ, Current Rating=3A, Dielectric Material=Polyamide, Insulation Resistance=1GΩ, LCSC=C3322645, Manufacturer=Harwin, Max Operating Temperature=105°C, Min Operating Temperature=-40°C, Supplier Part Number=952-1809-ND, Category="Card Edge Connectors", ComponentLink1Description=https://datasheet.octopart.com:443/M20-7820646-Harwin-datasheet-176383844.pdf?src-supplier=Newark, ComponentLink1URL=https://datasheet.octopart.com:443/M20-7820646-Harwin-datasheet-176383844.pdf?src-supplier=Newark, ComponentLink2Description=https://datasheet.octopart.com:443/M20-7820646-Harwin-datasheet-99119574.pdf?src-supplier=Farnell, ComponentLink2URL=https://datasheet.octopart.com:443/M20-7820646-Harwin-datasheet-99119574.pdf?src-supplier=Farnell, ComponentLink3Description=https://datasheet.octopart.com:443/M20-7820646-Harwin-datasheet-188872139.pdf?src-supplier=TME, ComponentLink3URL=https://datasheet.octopart.com:443/M20-7820646-Harwin-datasheet-188872139.pdf?src-supplier=TME, ComponentLink4Description=https://datasheet.octopart.com:443/M20-7820646-Harwin-datasheet-137074310.pdf?src-supplier=X-ON, ComponentLink4URL=https://datasheet.octopart.com:443/M20-7820646-Harwin-datasheet-137074310.pdf?src-supplier=X-ON, ComponentLink5Description=http://sigma.octopart.com:80/15888285/rohs_statement/Harwin-M20-7820646.pdf?src-supplier=Compliance+Statements, ComponentLink5URL=http://sigma.octopart.com:80/15888285/rohs_statement/Harwin-M20-7820646.pdf?src-supplier=Compliance+Statements, Connector Type="Receptacle, Socket", Contact Gender=Female, Contact Material=Bronze, Contact Plating=Tin, Depth=2.5mm, Gender=Female, Housing Color=Black, Housing Material=Nylon, Length=15.64mm, Lifecycle Status=Production, Manufacturer Part Number=M20-7820646, Max Current Rating=3A, Mounting Technology="Through Hole", Number of Contacts=6, Number of Positions=6, Number of Rows=1, Orientation=Straight, Pins=6, Pitch=2.54mm, Pricing="1=1,11, 36=0,86417, 108=0,79954, 504=0,7171, 1008=0,68287, 5004=0,60989, 10008=0,58081 (USD)", Radiation Hardening=No, REACH SVHC=Yes, RoHS=Compliant, Stock=414, Supplier=DigiKey, Terminal Pitch=2.54mm, Termination=Solder
U3: "Led RGB", Color=Black, Contact Resistance=20mΩ, Current Rating=3A, LCSC=C5184785, Manufacturer="Wurth Elektronik", Max Operating Temperature=105°C, Min Operating Temperature=-40°C, Operating Supply Voltage=250V, Supplier Part Number=732-5317-ND, Category="Headers and Wire Housings", ComponentLink1Description=https://datasheet.octopart.com:443/61300411121-W%C3%BCrth-Elektronik-datasheet-44382959.pdf?src-supplier=Future+Electronics, ComponentLink1URL=https://datasheet.octopart.com:443/61300411121-W%C3%BCrth-Elektronik-datasheet-44382959.pdf?src-supplier=Future+Electronics, ComponentLink2Description=https://datasheet.octopart.com:443/61300411121-W%C3%BCrth-Elektronik-datasheet-149524049.pdf?src-supplier=Farnell, ComponentLink2URL=https://datasheet.octopart.com:443/61300411121-W%C3%BCrth-Elektronik-datasheet-149524049.pdf?src-supplier=Farnell, ComponentLink3Description=https://datasheet.octopart.com:443/61300411121-W%C3%BCrth-Elektronik-datasheet-21154836.pdf?src-supplier=element14+APAC, ComponentLink3URL=https://datasheet.octopart.com:443/61300411121-W%C3%BCrth-Elektronik-datasheet-21154836.pdf?src-supplier=element14+APAC, ComponentLink4Description=https://datasheet.octopart.com:443/61300411121-Wurth-Elektronik-datasheet-169474491.pdf?src-supplier=RS+(Formerly+Allied+Electronics), ComponentLink4URL=https://datasheet.octopart.com:443/61300411121-Wurth-Elektronik-datasheet-169474491.pdf?src-supplier=RS+(Formerly+Allied+Electronics), Connector Type="Male Pin", Contact Material=Gold, Contact Mating Length=5.9944mm, Contact Plating=Gold, Gender=Male, Height=8.89mm, Lead Free="Lead Free", Lead Pitch=2.54mm, Manufacturer Part Number=61300411121, Mounting Technology="Through Hole", Number of Contacts=4, Number of Positions=4, Number of Rows=1, Orientation=Vertical, Packaging=Bulk, Pins=4, Pitch=2.54mm, Pricing="1=0,17, 10=0,147, 25=0,1216, 50=0,1018, 100=0,0918, 1000=0,085 (USD)", RoHS=Compliant, Stock=89389, Supplier=DigiKey, Termination=Solder, Voltage Rating=250V